# Altium PCB LM-008.PcbDoc (part 1 of 2)
Units mil, origin at the board's own origin, x right, y up, seen from the top; angles counter-clockwise.
Board outline 2402.07 x 2867.53 mil, 4 copper layers (Top Layer, Signal Layer 1, Signal Layer 2, Bottom Layer), stack 30.635 mil thick; 53 components, 52 nets, 456 pads, 38 vias.
Unrouted connection lines stored in the file: 15.
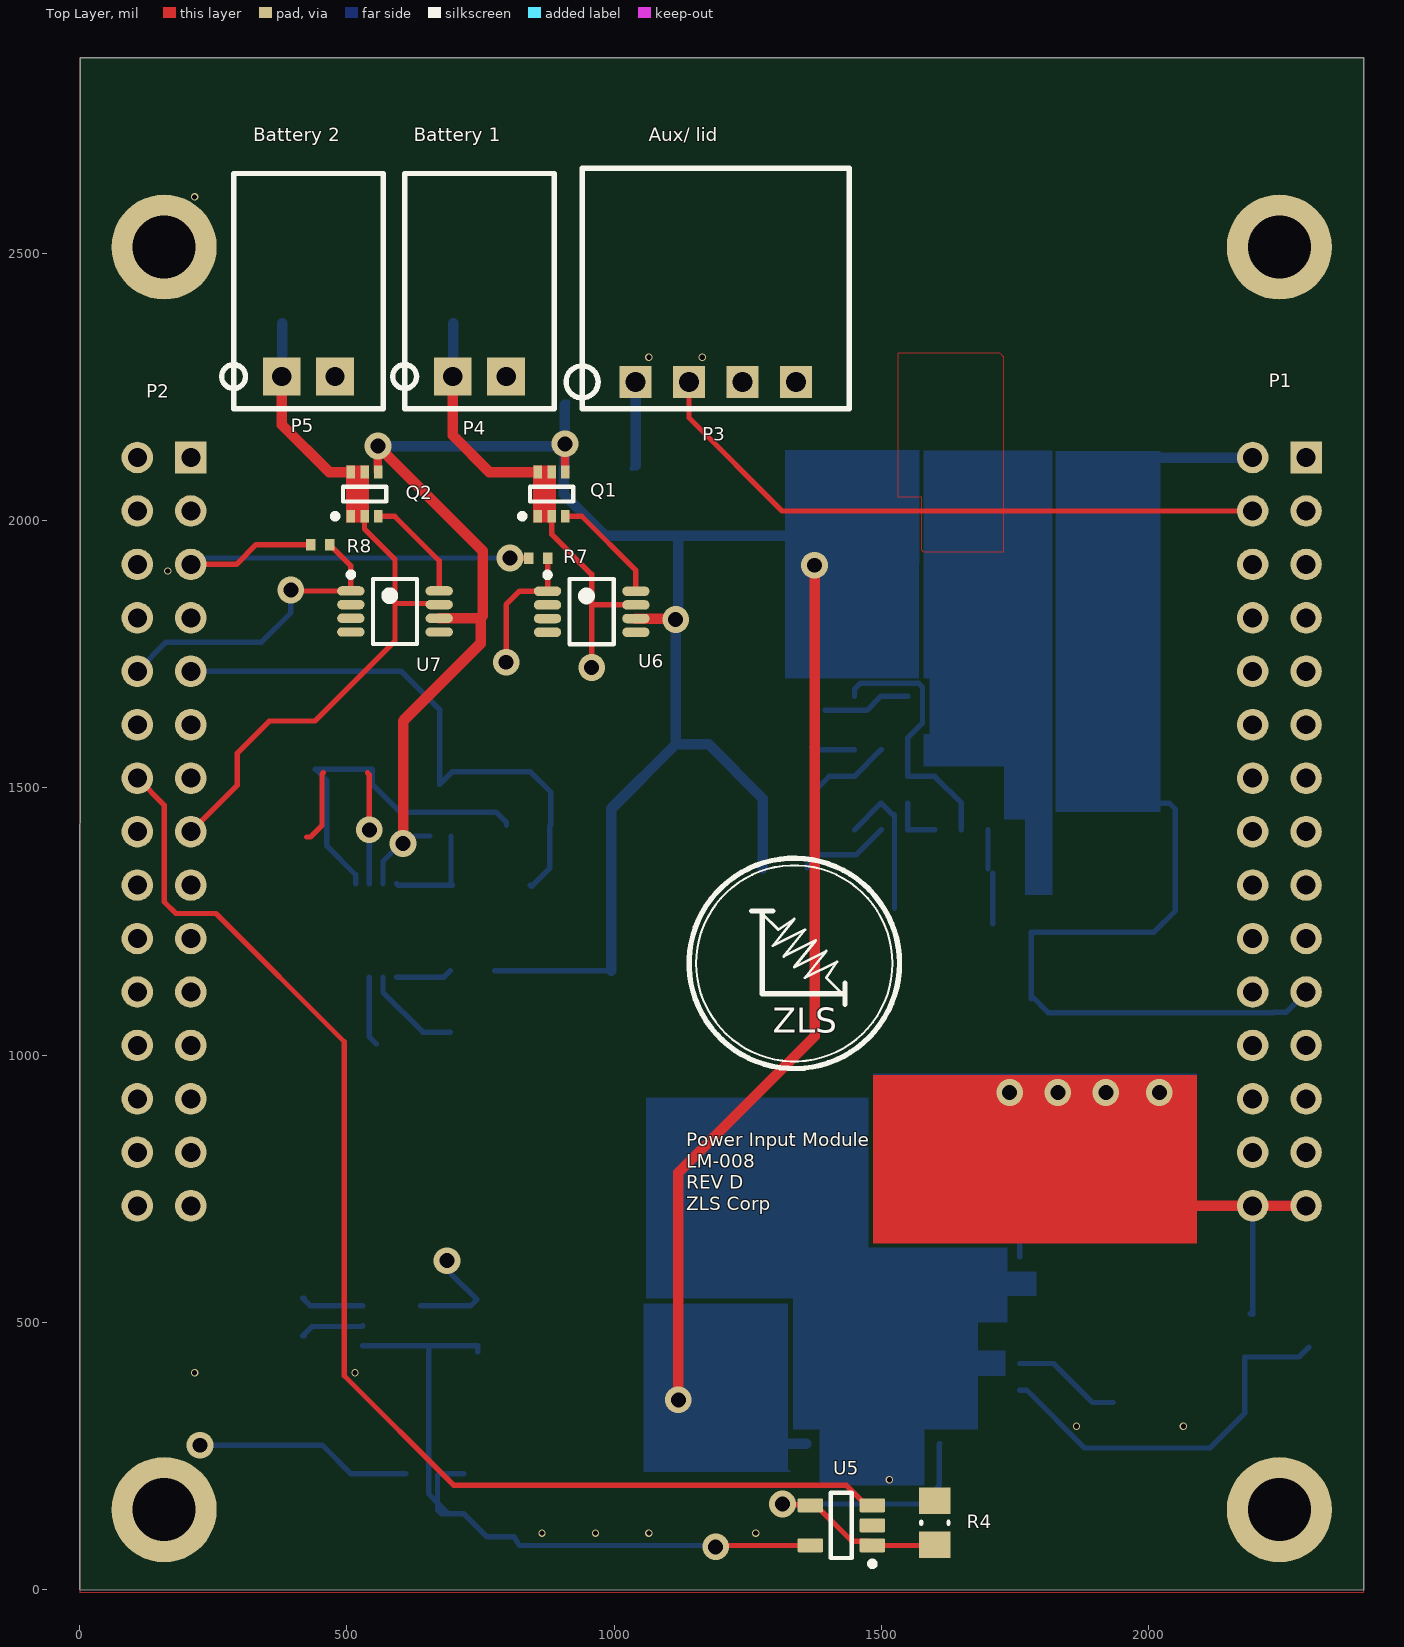
[diagram p0: Top Layer view]
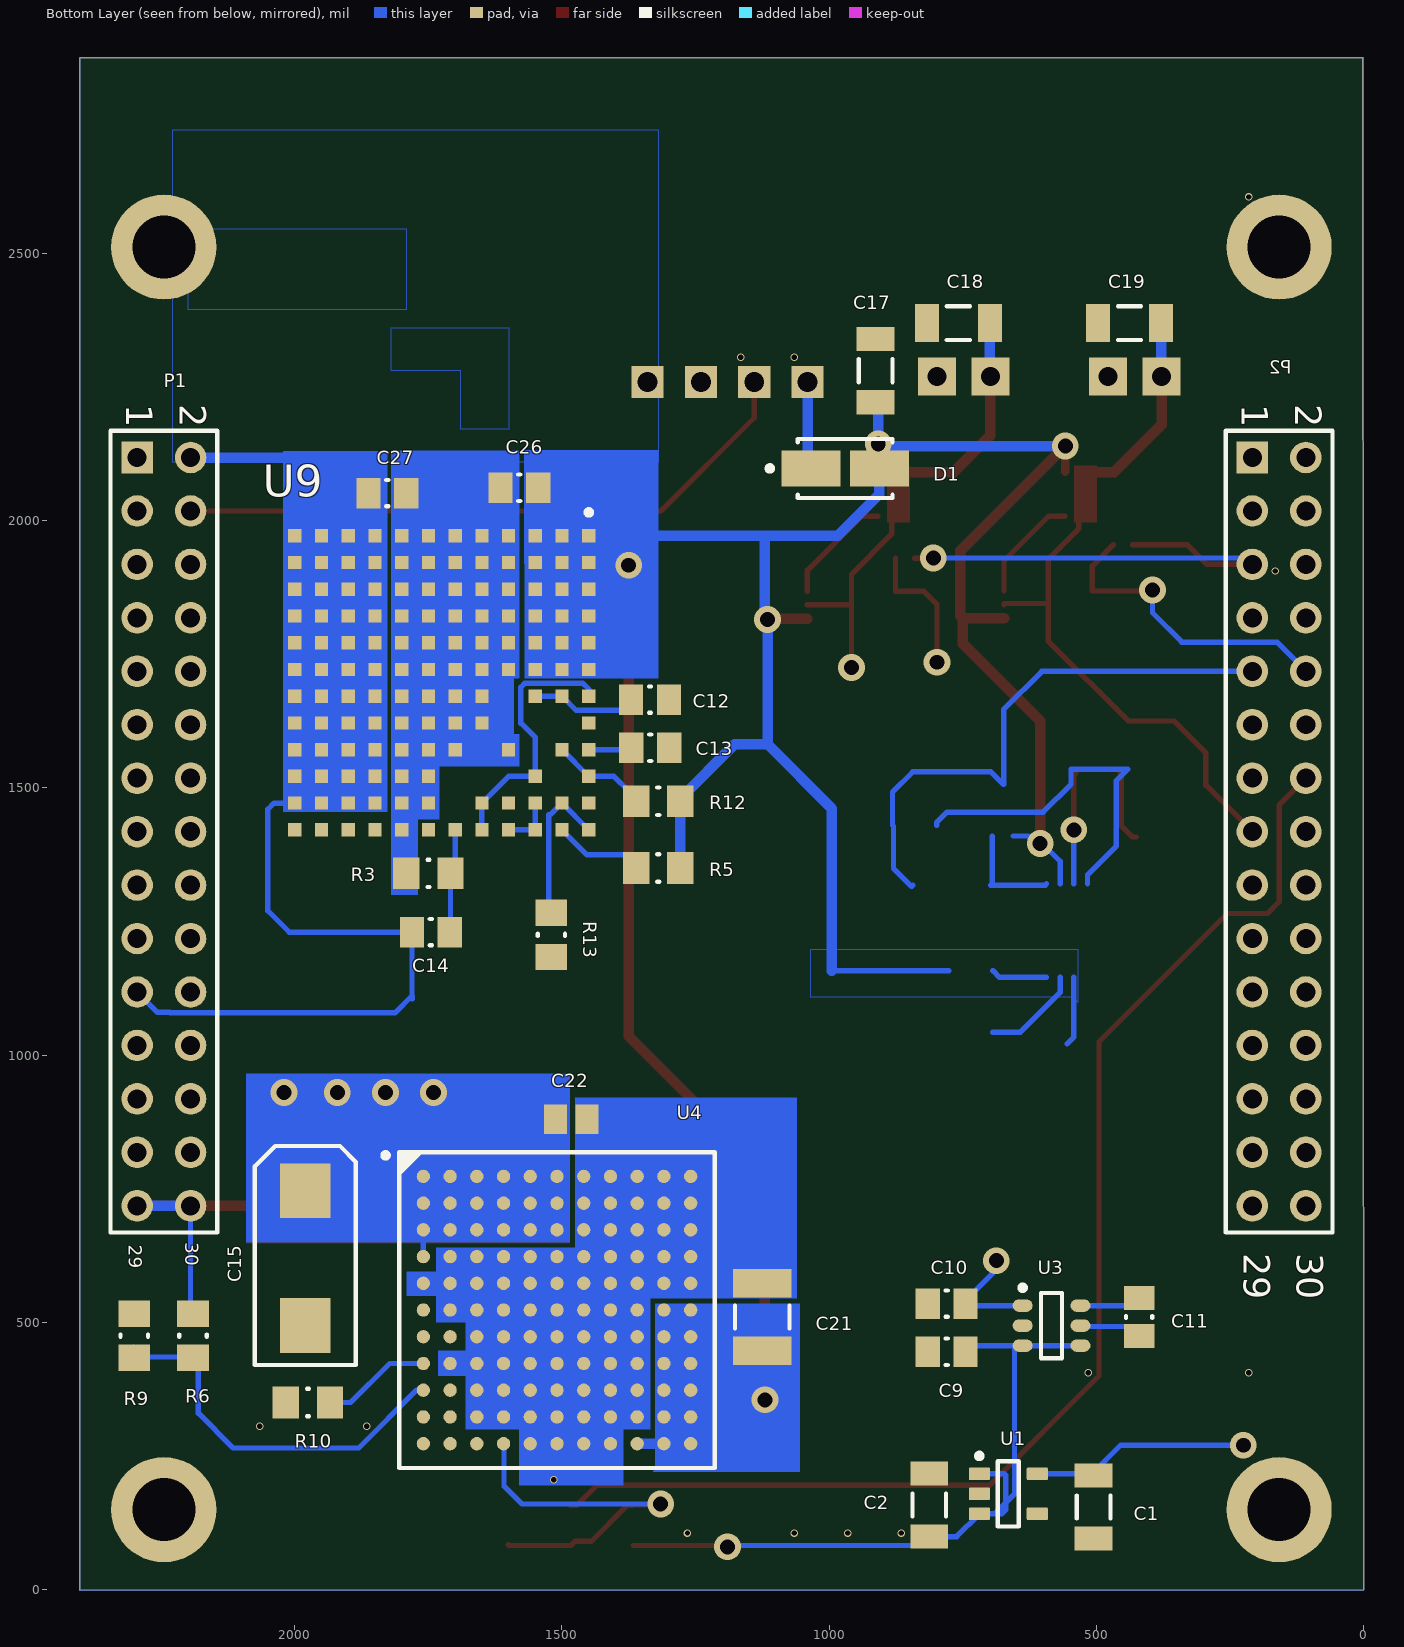
[diagram p1: Bottom Layer view, seen from below]
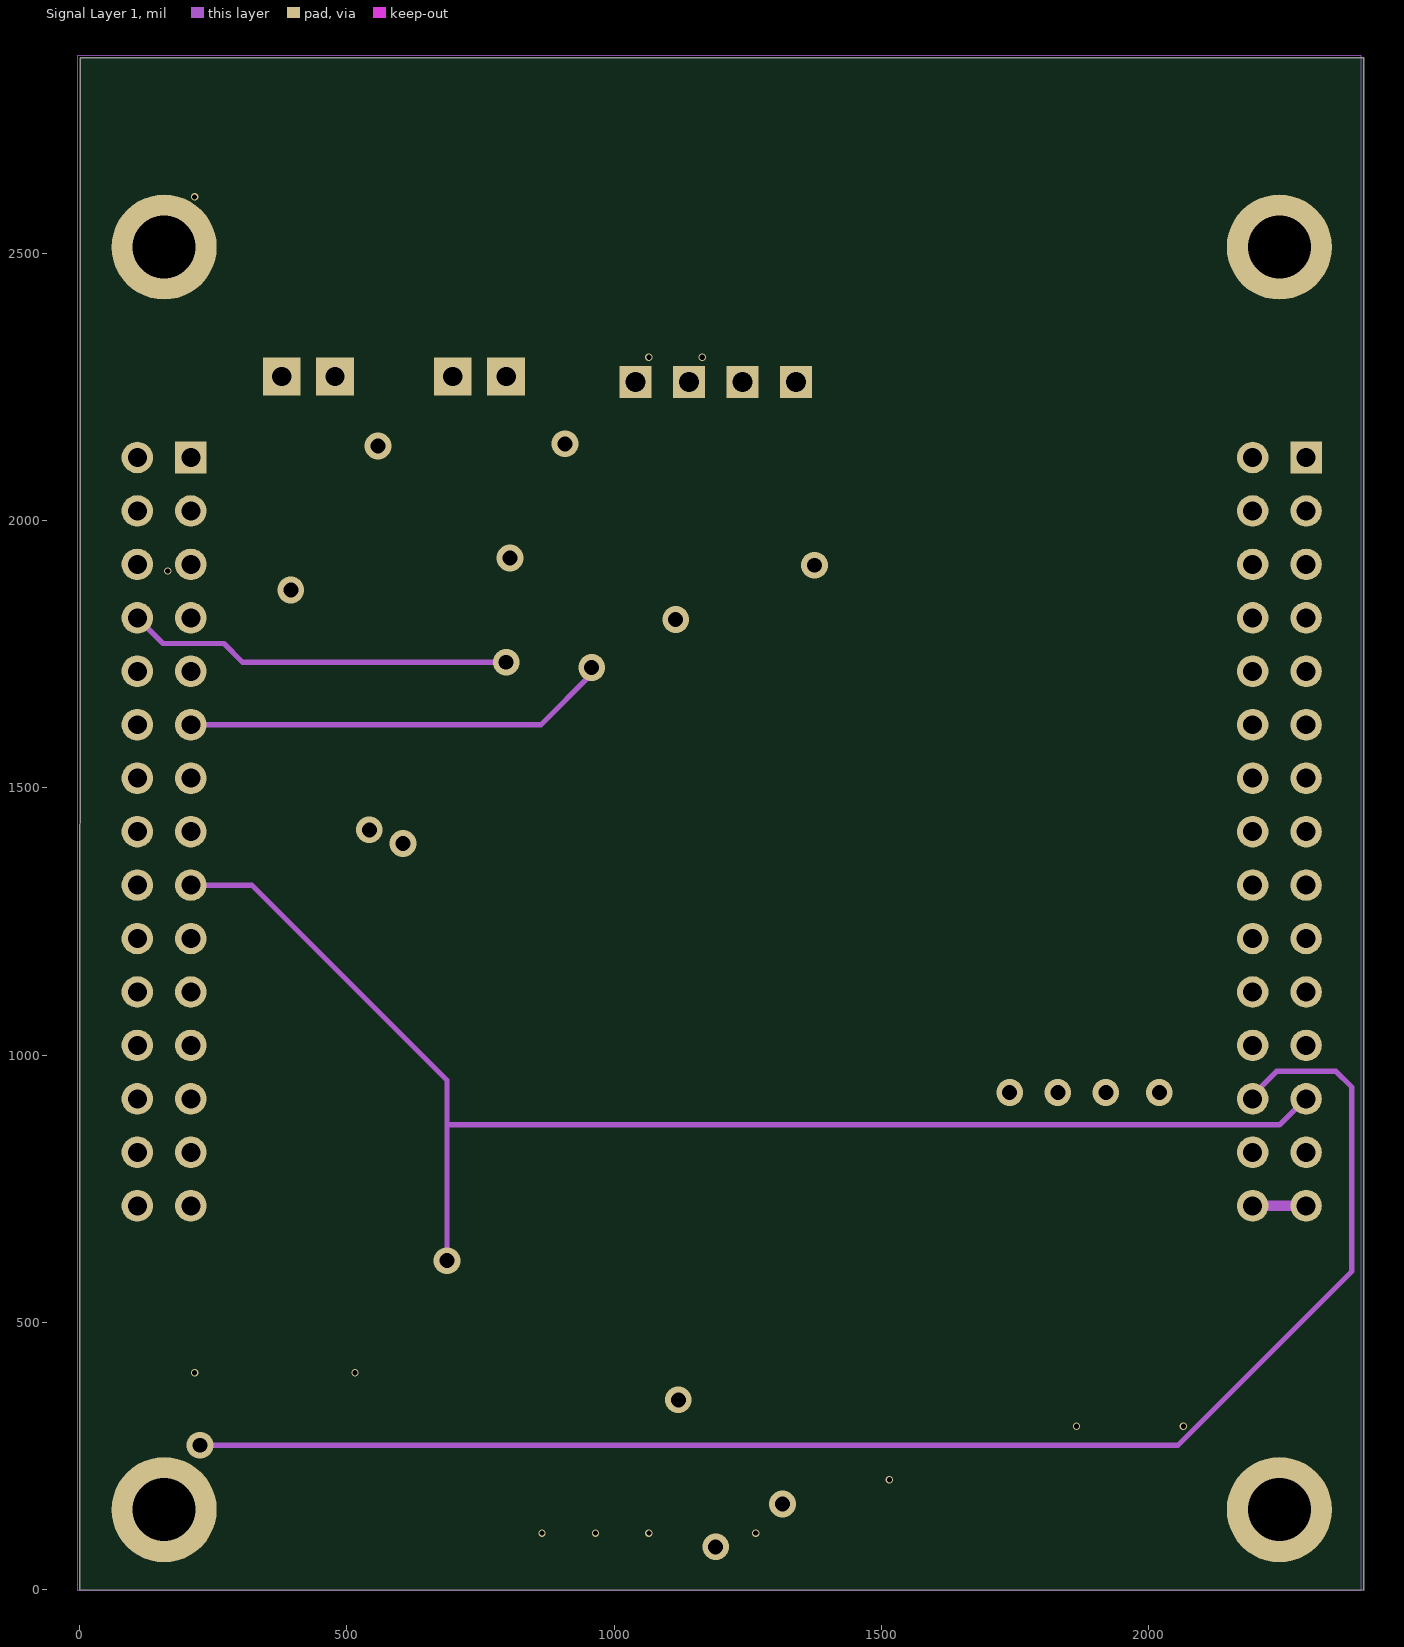
[diagram p2: Signal Layer 1]
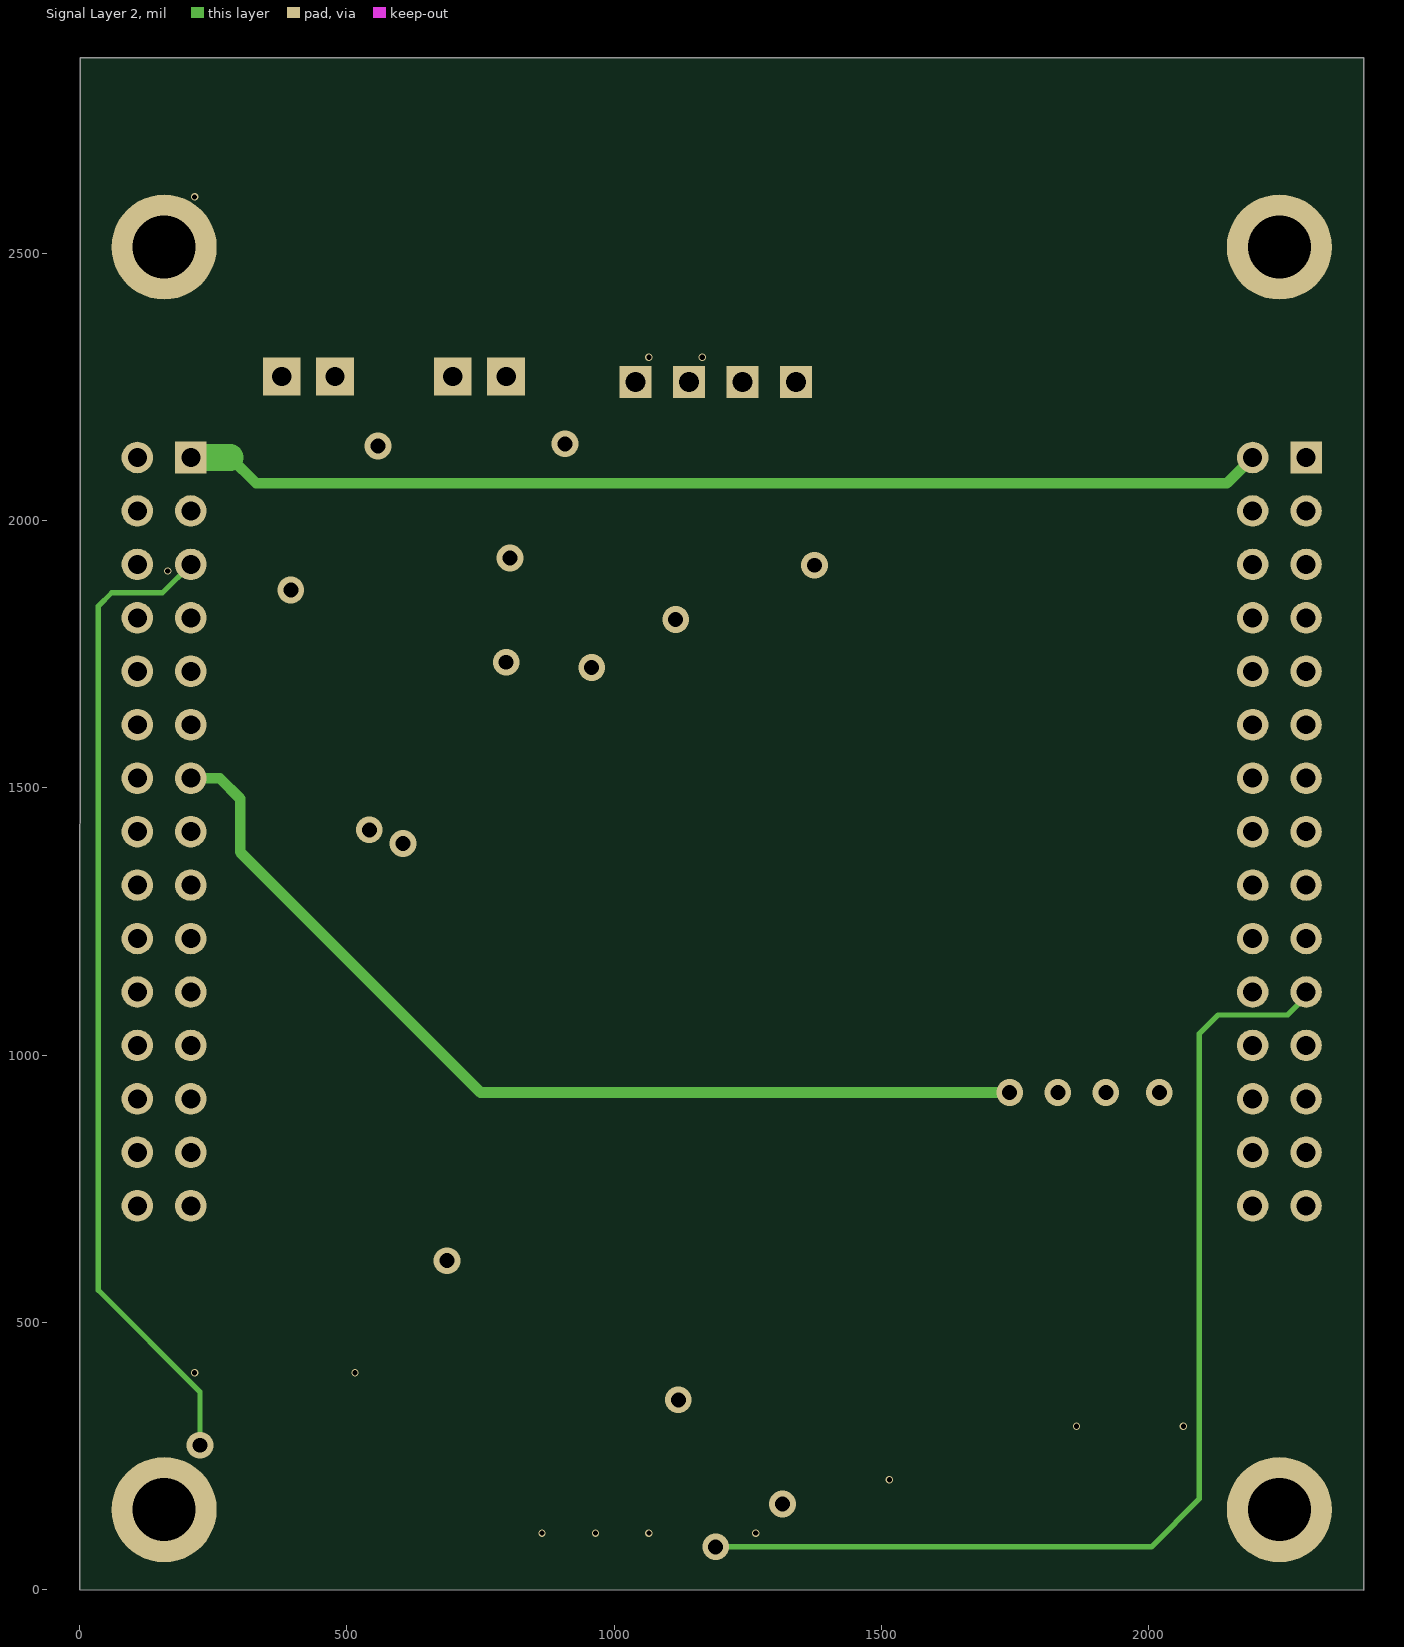
[diagram p3: Signal Layer 2]

## Layer stack, top to bottom
Top Solder: solder mask 0.4, Solder Resist, Dk 3.5
Top Layer: signal copper 1.4
Dielectric 1: core 10, FR-4, Dk 4.2
Signal Layer 1: signal copper 1.4173
Dielectric 3: prepreg 5, Dk 4.2
Signal Layer 2: signal copper 1.4173
Dielectric 2: core 10, Dk 4.2
Bottom Layer: signal copper 1.4
Bottom Solder: solder mask 0.4, Solder Resist, Dk 3.5

## Board outline
0,-0.49 2402.07,-1.4 2402.07,2866.13 1.04,2866.04

## Design rules (kind name [scope] priority, off if disabled: settings)
Clearance [All] p1: gap=3.94 ignorepadtopadclearanceinfootprint=TRUE except(0.2: SMDPad-Via THPad-THPad THPad-Via Via-Via; 7.87: Arc-Hole Track-Hole Text-Text Text-Hole)
HoleSize [All] p1: absolutevalues=TRUE maxlimit=196.85 minlimit=0.39 maxpercent=80.000 minpercent=20.000
HoleToHoleClearance [All] p1: gap=0.39 allowstackedmicrovias=TRUE
MinimumSolderMaskSliver [All] p1: minsoldermaskwidth=1.46
PolygonConnect [All] p1: connectstyle=Relief reliefconductorwidth=10 reliefentries=4 polygonreliefangle="90 Angle" airgapwidth=10
RoomDefinition ZP [InComponentClass('ZP')] p1: confinementstyle=ConfineIn formatcopy=TRUE lockcomponents=FALSE outline 2755,1085 3685,1085 3685,1700 2755,1700
RoutingVias [All] p1: holewidth=28 width=50 viastyle="Through Hole" minholewidth=28 minwidth=50 maxholewidth=28 maxwidth=50
SilkToSilkClearance [All] p1: silktosilkclearance=7.87
SilkToSolderMaskClearance [IsPad] p1: minsilkscreentomaskgap=6.89 clearancetoexposedcopper=TRUE
SolderMaskExpansion [All] p1: expansion=4
Width [All] p1: maxlimit=39.37 minlimit=5 preferedwidth=10
25 further rules are at their usual default settings.

## Classes and differential pairs
component class BBB-Supply: C12 C13 C14 C26 C27 R3 R5 R12 R13 U9
component class 12_Supply: C15 C21 C22 R4 R6 R9 R10 U4 U5
component class Power_Input_FET: C17 C18 C19 D1 P3 P4 P5 Q1 Q2 R7 R8 RL2 RL? U6 U7
component class ZP: C3 C4 C5 C6 C8 D2 L1 R1 R2 R11 R14 U2
component class LM-008: C1 C2 C9 C10 C11 P1 P2 U1 U3

## Components (designator, comment, footprint, x,y, rotation, side; value= is the part's Value field where it differs from the comment)
C1 "CAP CER 1UF 50V X7R 1210" CAPC1206(3216)130_N 505,154.55 r90 bottom
C2 "CAP CER 1UF 50V X7R 1210" CAPC1206(3216)130_N 812.59,158.1 r270 bottom
C3 "220pF" CAPC0402(1005)60_L 3035,1374.11 r270 top
C4 "47pF" CAPC0402(1005)60_L 3081.82,1470 r270 top
C5 "4.7uF" CAPC0805(2012)155_L 2965,1390 r270 top
C6 ".47uF" CAPC0402(1005)60_L 3529.17,1374.11 r270 top
C8 "CAP CER 1UF 25V X7R 0805" CAPC0805(2012)155_L 3220,1530 r270 top
C9 "10uF" CAPC0805(2012)145_N 780,445 r0 bottom
C10 "10uF" CAPC0805(2012)145_N 780,535 r0 bottom
C11 "1uF" CAPC0805(2012)145_N 420,510 r90 bottom
C12 "10uF" CAPC0805(2012)145_N 1335,1665 r180 bottom
C13 ".01uF" CAPC0805(2012)145_N 1334.57,1575 r0 bottom
C14 "10uF" CAPC0805(2012)145_N 1745,1230 r180 bottom
C15 "68uF" AVX-CAPC7343_V 1980,620 r270 bottom
C17 "CAP CER 10UF 6.3V X5R 1206" CAPC1206(3216)130_N 912.98,2280.55 r270 bottom
C18 "CAP CER 10UF 6.3V X5R 1206" CAPC1206(3216)130_N 757.98,2369.55 r180 bottom
C19 "CAP CER 10UF 6.3V X5R 1206" CAPC1206(3216)130_N 437.98,2369.55 r180 bottom
C21 "4.7uF" CAPC1210(3225)100_M 1125,510 r270 bottom
C22 "10uF" C0805 1482.13,880 r180 bottom
C26 "10uF" CAPC0805(2012)145_N 1579.57,2061.5 r0 bottom
C27 "10uF" CAPC0805(2012)145_N 1826.49,2051.5 r180 bottom
D1 "CDBA540-HF" VISH-DO-214AC-2_M 969.98,2097.55 r180 bottom
D2 "1N5819HW-7-F" DIOD-SOD-123-2_V 3160,1360.4 r90 top
L1 "74404054330" "WE-LQS 5040" 2945,1225 r270 top
P1 "SSW-115-21-G-D" HDR2X15 2294.59,2118.05 r270 bottom locked
P2 "Header 15X2" HDR2X15 207.98,2118.05 r270 bottom
P3 "IPL1-104-01-L-S-RA-K" IPL1-104-01-L-S-RA-K 1039.98,2259.55 r0 top
P4 "IPL1-102-01-F-S-RA-K" IPL1-102-01-F-S-RA-K 697.98,2269.55 r0 top
P5 "IPL1-102-01-F-S-RA-K" IPL1-102-01-F-S-RA-K 377.98,2269.55 r0 top
Q1 "MCH6336-TL-E" ONSC-MCPH-6_V 882.98,2049.55 r90 top
Q2 "MCH6336-TL-E" ONSC-MCPH-6_V 532.98,2049.55 r90 top
R1 "487k" RESC0402(1005)_M 3540,1265 r90 top
R2 "768" RESC0402(1005)_M 3225,1408.63 r90 top
R3 "100k" RESC0805(2012)_M 1749.57,1340 r180 bottom
R4 "RES SMD 100K OHM 1% 1/8W 0805" RESC0805(2012)_M 1600,125 r90 top
R5 "2M" RESC0805(2012)_M 1319.57,1350 r0 bottom
R6 "RES SMD 100K OHM 1% 1/8W 0805" RESC0805(2012)_M 2190,475 r270 bottom
R7 "560k" RESC0402(1005)_L 857.98,1929.55 r180 top
R8 "560k" RESC0402(1005)_L 450,1955 r180 top
R9 "RES SMD 11K OHM 1% 1/8W 0805" RESC0805(2012)_M 2300,475 r90 bottom
R10 "RES SMD 35K OHM 1% 1/8W 0805" RESC0805(2012)_M 1975,350 r0 bottom
R11 "6.19k" RESC0402(1005)_M 3580,1355 r90 top
R12 "100k" RESC0805(2012)_M 1319.57,1475 r180 bottom
R13 "392k" RESC0805(2012)_M 1519.57,1225 r270 bottom
R14 "6.19k" RESC0402(1005)_M 3081.82,1381.68 r90 top
U1 "TLV70233DBVR" DBV0005A_N 664.59,179.1 r180 bottom
U2 "LT8570" LT8570-MSOP 3380,1341.63 r0 top
U3 "LM2776DBVR" LM2776DBVR 583.73,493.84 r180 bottom
U4 "LTM8055IY" LT-BGA-121-15000X15000X4920 1509,523 r180 bottom
U5 "OPA188AIDBVR" DBV0005A_M 1425,120 r180 top
U6 "LTC4414EMS8#TRPBF" LT-MS8-8_L 957.98,1829.55 r0 top
U7 "LTC4414EMS8#TRPBF" LT-MS8-8_L 590,1830 r0 top
U9 "LTM4612EV#PBF" LT-LGA-133-05-08-1766_V 1724.57,1696.5 r270 bottom

## Footprints (in the part's own frame and the unit in brackets; to place one, negate y for a bottom-side part, rotate by r counter-clockwise, add the part's x,y. Pads: shape width x height; smd on the part's side, far side on the other; paste and mask are expansions set on the pad)
AVX-CAPC7343_V [mm] "SMT Capacitor, 2 Leads, Body 7.3x4.3mm"
  rect 2.6x2.4 smd: 1(-3.202,0.007) 2(3.198,0.007)
  silkscreen extent -5.33,-2.4 5.08,2.4, body extent -3.49,-2.03 3.51,2.04, height 2.9
C0805 [mm] "Chip Capacitor, Body 2.0x1.3mm, IPC High Density"
  rect 1.1x1.4 smd: 1(-0.75,0) 2(0.75,0)
  body extent -1.1,-0.72 1.1,0.72, height 1.4
CAPC0402(1005)60_L [mm] "Chip Capacitor, Body 1.0x0.5mm, Height 0.6mm, IPC High Density"
  rect 0.52x0.52 smd: 1(-0.4,0) 2(0.4,0)
  body extent -0.55,-0.3 0.55,0.3, height 0.6
CAPC0805(2012)145_N [mm] "Chip Capacitor, Body 2.0x1.2mm, Height 1.45mm, IPC Medium Density"
  rect 1.15x1.45 smd: 1(-0.9,0) 2(0.9,0)
  silkscreen extent -0.05,-0.63 0.05,0.63, body extent -1.1,-0.72 1.1,0.73, height 1.45
CAPC0805(2012)155_L [mm] "Chip Capacitor, Body 2.0x1.2mm, Height 1.55mm, IPC High Density"
  rect 0.95x1.35 smd: 1(-0.8,0) 2(0.8,0)
  silkscreen extent -0.05,-0.58 0.05,0.58, body extent -1.1,-0.72 1.1,0.72, height 1.55
CAPC1206(3216)130_N [mm] "Chip Capacitor, Body 3.2x1.6mm, Height 1.3mm, IPC Medium Density"
  rect 1.15x1.8 smd: 1(-1.5,0) 2(1.5,0)
  silkscreen extent -0.55,-0.8 0.55,0.8, body extent -1.7,-0.9 1.7,0.9, height 1.3
CAPC1210(3225)100_M [mm] "Chip Capacitor, Body 3.2x2.5mm, Height 1mm, IPC Low Density"
  rect 1.35x2.8 smd: 1(-1.6,0) 2(1.6,0)
  silkscreen extent -0.55,-1.3 0.55,1.3, body extent -1.7,-1.35 1.7,1.35, height 1
DBV0005A_M [mm] "SOT23, 5-Leads, Body 3.05x1.75mm, Pitch 0.95mm, IPC Low Density"
  rrect15% 1.2x0.65 smd: 1(-1.475,0.95) 2(-1.475,0) 3(-1.475,-0.95) 4(1.475,-0.95) 5(1.475,0.95)
  silkscreen extent -1.6,-1.55 0.5,1.95, body extent -1.42,-1.46 1.42,1.46, height 1.08
DBV0005A_N [mm] "SOT23, 5-Leads, Body 3.05x1.75mm, Pitch 0.95mm, IPC Medium Density"
  rrect17% 1x0.6 smd: 1(-1.375,0.95) 2(-1.375,0) 3(-1.375,-0.95) 4(1.375,-0.95) 5(1.375,0.95)
  silkscreen extent -1.5,-1.55 0.5,1.92, body extent -1.42,-1.46 1.42,1.46, height 1.08
DIOD-SOD-123-2_V [mm] "SOD-123, 2-Leads, Body 2.85x1.7mm (max), Pitch 3.7mm"
  rect 1.2x0.7 smd: 1(-1.85,0) 2(1.85,0)
  silkscreen extent -1.43,-0.85 1.97,1.02, body extent -1.42,-0.85 1.43,0.85, height 1.45
HDR2X15 [mm] "Connector; Header; 15x2 Position"
  rect 1.5x1.5 hole 0.9: 1(0,0)
  round 1.5 hole 0.9: 2(0,2.54) 3(2.54,0) 4(2.54,2.54) 5(5.08,0) 6(5.08,2.54) 7(7.62,0) 8(7.62,2.54) 9(10.16,0) 10(10.16,2.54) 11(12.7,0) 12(12.7,2.54) 13(15.24,0) 14(15.24,2.54) 15(17.78,0) 16(17.78,2.54) 17(20.32,0) 18(20.32,2.54) 19(22.86,0) 20(22.86,2.54) 21(25.4,0) 22(25.4,2.54) 23(27.94,0) 24(27.94,2.54) 25(30.48,0) 26(30.48,2.54) 27(33.02,0) 28(33.02,2.54) 29(35.56,0) 30(35.56,2.54)
  silkscreen extent -1.27,-1.27 36.83,3.81
IPL1-102-01-F-S-RA-K [mm] ".100 TERMINAL ASSEMBLY"
  rect 1.8x1.8 hole 0.91: 1(0,0) 2(2.54,0)
  silkscreen extent -2.85,-1.52 4.83,9.65, body extent -2.03,-0.25 4.57,9.4, height 6.56
IPL1-104-01-L-S-RA-K [mil]
  rect 60x60 hole 37.4: 1(0,0) 2(100,0) 3(200,0) 4(300,0)
  silkscreen extent -130,-50 400,400, body extent -80,-12 380,380, height 258
LM2776DBVR [mm]
  oval 0.95x0.6 smd: 1(-1.375,0.95) 2(-1.375,0) 3(-1.375,-0.95) 4(1.375,-0.95) 5(1.375,0) 6(1.375,0.95)
  silkscreen extent -1.5,-1.55 0.5,1.92, body extent -1.39,-1.55 1.39,1.55, height 1.45
LT8570-MSOP [mm]
  oval 1.35x0.5 smd: 1(-2.225,0.975) 2(-2.225,0.325) 3(-2.225,-0.325) 4(-2.225,-0.975) 5(2.225,-0.975) 6(2.225,-0.325) 7(2.225,0.325) 8(2.225,0.975)
  rect 1.75x1.96 smd: 9(0,0)
  silkscreen extent -2.35,-1.55 1.15,1.9, body extent -2.45,-1.55 2.45,1.55, height 1.1
LT-BGA-121-15000X15000X4920 [mil] "BGA, 121-Balls, Body 15x15mm, Pitch 1.27mm"
  round 25 smd: A1(-250,250) A2(-200,250) A3(-150,250) A4(-100,250) A5(-50,250) A6(0,250) A7(50,250) A8(100,250) A9(150,250) A10(200,250) A11(250,250) B1(-250,200) B2(-200,200) B3(-150,200) B4(-100,200) B5(-50,200) B6(0,200) B7(50,200) B8(100,200) B9(150,200) B10(200,200) B11(250,200) C1(-250,150) C2(-200,150) C3(-150,150) C4(-100,150) C5(-50,150) C6(0,150) C7(50,150) C8(100,150) C9(150,150) C10(200,150) C11(250,150) D1(-250,100) D2(-200,100) D3(-150,100) D4(-100,100) D5(-50,100) D6(0,100) D7(50,100) D8(100,100) D9(150,100) D10(200,100) D11(250,100) E1(-250,50) E2(-200,50) E3(-150,50) E4(-100,50) E5(-50,50) E6(0,50) E7(50,50) E8(100,50) E9(150,50) E10(200,50) E11(250,50) F1(-250,0) F2(-200,0) F3(-150,0) F4(-100,0) F5(-50,0) F6(0,0) F7(50,0) F8(100,0) F9(150,0) F10(200,0) F11(250,0) G1(-250,-50) G2(-200,-50) G3(-150,-50) G4(-100,-50) G5(-50,-50) G6(0,-50) G7(50,-50) G8(100,-50) G9(150,-50) G10(200,-50) G11(250,-50) H1(-250,-100) H2(-200,-100) H3(-150,-100) H4(-100,-100) H5(-50,-100) H6(0,-100) H7(50,-100) H8(100,-100) H9(150,-100) H10(200,-100) H11(250,-100) J1(-250,-150) J2(-200,-150) J3(-150,-150) J4(-100,-150) J5(-50,-150) J6(0,-150) J7(50,-150) J8(100,-150) J9(150,-150) J10(200,-150) J11(250,-150) K1(-250,-200) K2(-200,-200) K3(-150,-200) K4(-100,-200) K5(-50,-200) K6(0,-200) K7(50,-200) K8(100,-200) K9(150,-200) K10(200,-200) K11(250,-200) L1(-250,-250) L2(-200,-250) L3(-150,-250) L4(-100,-250) L5(-50,-250) L6(0,-250) L7(50,-250) L8(100,-250) L9(150,-250) L10(200,-250) L11(250,-250)
  silkscreen extent -326,-295 295,295, body extent -295,-295 295,295, height 202
LT-LGA-133-05-08-1766_V [mm] "LGA, 133-Leads, Body 15x15mm, Pitch 1.27mm"
  rect 0.63x0.63 smd: A1(-6.985,6.985) A2(-5.715,6.985) A3(-4.445,6.985) A4(-3.175,6.985) A5(-1.905,6.985) A6(-0.635,6.985) A7(0.635,6.985) A8(1.905,6.985) A9(3.175,6.985) A10(4.445,6.985) A11(5.715,6.985) A12(6.985,6.985) B1(-6.985,5.715) B2(-5.715,5.715) B3(-4.445,5.715) B4(-3.175,5.715) B5(-1.905,5.715) B6(-0.635,5.715) B7(0.635,5.715) B9(3.175,5.715) B11(5.715,5.715) B12(6.985,5.715) C1(-6.985,4.445) C2(-5.715,4.445) C3(-4.445,4.445) C4(-3.175,4.445) C5(-1.905,4.445) C6(-0.635,4.445) C7(0.635,4.445) C10(4.445,4.445) C11(5.715,4.445) C12(6.985,4.445) D1(-6.985,3.175) D2(-5.715,3.175) D3(-4.445,3.175) D4(-3.175,3.175) D5(-1.905,3.175) D6(-0.635,3.175) D9(3.175,3.175) D11(5.715,3.175) D12(6.985,3.175) E1(-6.985,1.905) E2(-5.715,1.905) E3(-4.445,1.905) E4(-3.175,1.905) E5(-1.905,1.905) E6(-0.635,1.905) E7(0.635,1.905) E8(1.905,1.905) E11(5.715,1.905) E12(6.985,1.905) F1(-6.985,0.635) F2(-5.715,0.635) F3(-4.445,0.635) F4(-3.175,0.635) F5(-1.905,0.635) F6(-0.635,0.635) F7(0.635,0.635) F8(1.905,0.635) F9(3.175,0.635) F12(6.985,0.635) G1(-6.985,-0.635) G2(-5.715,-0.635) G3(-4.445,-0.635) G4(-3.175,-0.635) G5(-1.905,-0.635) G6(-0.635,-0.635) G7(0.635,-0.635) G8(1.905,-0.635) G9(3.175,-0.635) G10(4.445,-0.635) G11(5.715,-0.635) G12(6.985,-0.635) H1(-6.985,-1.905) H2(-5.715,-1.905) H3(-4.445,-1.905) H4(-3.175,-1.905) H5(-1.905,-1.905) H6(-0.635,-1.905) H7(0.635,-1.905) H8(1.905,-1.905) H9(3.175,-1.905) H10(4.445,-1.905) H11(5.715,-1.905) H12(6.985,-1.905) J1(-6.985,-3.175) J2(-5.715,-3.175) J3(-4.445,-3.175) J4(-3.175,-3.175) J5(-1.905,-3.175) J6(-0.635,-3.175) J7(0.635,-3.175) J8(1.905,-3.175) J9(3.175,-3.175) J10(4.445,-3.175) J11(5.715,-3.175) J12(6.985,-3.175) K1(-6.985,-4.445) K2(-5.715,-4.445) K3(-4.445,-4.445) K4(-3.175,-4.445) K5(-1.905,-4.445) K6(-0.635,-4.445) K7(0.635,-4.445) K8(1.905,-4.445) K9(3.175,-4.445) K10(4.445,-4.445) K11(5.715,-4.445) K12(6.985,-4.445) L1(-6.985,-5.715) L2(-5.715,-5.715) L3(-4.445,-5.715) L4(-3.175,-5.715) L5(-1.905,-5.715) L6(-0.635,-5.715) L7(0.635,-5.715) L8(1.905,-5.715) L9(3.175,-5.715) L10(4.445,-5.715) L11(5.715,-5.715) L12(6.985,-5.715) M1(-6.985,-6.985) M2(-5.715,-6.985) M3(-4.445,-6.985) M4(-3.175,-6.985) M5(-1.905,-6.985) M6(-0.635,-6.985) M7(0.635,-6.985) M8(1.905,-6.985) M9(3.175,-6.985) M10(4.445,-6.985) M11(5.715,-6.985) M12(6.985,-6.985)
  silkscreen extent -8.22,6.86 -7.98,7.11, body extent -7.5,-7.5 7.5,7.5, height 2.92
LT-MS8-8_L [mm] "SOP, 8-Leads, Body 3.1x3.1mm, Pitch 0.65mm, IPC High Density"
  oval 1.3x0.45 smd: 1(-2.1,0.975) 2(-2.1,0.325) 3(-2.1,-0.325) 4(-2.1,-0.975) 5(2.1,-0.975) 6(2.1,-0.325) 7(2.1,0.325) 8(2.1,0.975)
  silkscreen extent -2.22,-1.55 1.05,1.87, body extent -1.55,-1.55 1.55,1.55, height 1.1
ONSC-MCPH-6_V [mm] "SOT23, 6-Leads, Body 2x1.6mm, Pitch 0.65mm"
  rect 0.6x0.4 smd: 1(-1.05,0.65) 2(-1.05,0) 3(-1.05,-0.65) 4(1.05,-0.65) 5(1.05,0) 6(1.05,0.65)
  silkscreen extent -1.17,-1.03 0.35,1.52, body extent -0.8,-1 0.8,1, height 0.9
RESC0402(1005)_L [mm] "Chip Resistor, Body 1.0x0.5mm, IPC High Density"
  rect 0.45x0.55 smd: 1(-0.45,0) 2(0.45,0)
  body extent -0.52,-0.27 0.53,0.28, height 0.4
RESC0402(1005)_M [mm] "Chip Resistor, Body 1.0x0.5mm, IPC Low Density"
  rect 0.65x0.75 smd: 1(-0.55,0) 2(0.55,0)
  body extent -0.52,-0.28 0.53,0.28, height 0.4
RESC0805(2012)_M [mm] "Chip Resistor, Body 2.0x1.3mm, IPC Low Density"
  rect 1.25x1.5 smd: 1(-1.05,0) 2(1.05,0)
  silkscreen extent -0.05,-0.65 0.05,0.65, body extent -1.1,-0.67 1.1,0.67, height 0.7
VISH-DO-214AC-2_M [mm] "DO-214AC, 2-Leads, Body 4.5x2.79mm, IPC Low Density"
  rect 2.8x1.7 smd: 1(-1.625,0) 2(1.625,0)
  silkscreen extent -3.7,-1.4 2.25,1.4, body extent -2.25,-1.39 2.25,1.4, height 2.29
"WE-LQS 5040" [mm] "SMD Power Inductor, 2-Leads, Body 5.0x5.0mm"
  rect 1.4x4.2 smd: 1(-1.85,0) 2(1.85,0)
  body extent -2.5,-2.5 2.5,2.5, height 3.99

## Part data
C1 C2: library part CMP-1037-04913-1, Capacitance=1µF, Manufacturer="Murata Electronics North America", Manufacturer Part Number=GRM32RR71H105KA01L, Operating Temperature="-55°C ~ 125°C", Package / Case="1210 (3225 Metric)", Ratings=-, Supplier Part Number 1=490-1863-6-ND, Temperature Coefficient=X7R, Tolerance=±10%, Voltage - Rated=50V, Applications="General Purpose", Category=Capacitors, ComponentLink1Description=http://search.murata.co.jp/Ceramy/image/img/A01X/G101/ENG/GRM32RR71H105KA01-01.pdf, ComponentLink1URL=http://search.murata.co.jp/Ceramy/image/img/A01X/G101/ENG/GRM32RR71H105KA01-01.pdf, Features=-, Height - Seated (Max)=-, Lead Spacing=-, Lead Style=-, Mounting Type="Surface Mount, MLCC", Packaging=Digi-Reel®, Part Status=Active, Pricing 1="1=0.35, 10=0.242, 100=0.1449, 500=0.10868 (USD)", RoHS="RoHS Compliant", Size / Dimension="0.126\" L x 0.098\" W (3.20mm x 2.50mm)", Stock 1=66890, Supplier 1=Digi-Key, Thickness (Max)="0.079\" (2.00mm)"
C3 C4 C6: library part CMP-1034-00252-1, "CAP CER 0.1UF 10V X7R 0402"
C5: library part CMP-1036-04882-1
C8: library part CMP-1036-04882-1, Capacitance=4.7uF, Manufacturer="Murata Electronics North America", Manufacturer Part Number=GRM21BR71E105KA99L, Operating Temperature="-55°C ~ 125°C", Package / Case="0805 (2012 Metric)", Ratings=-, Supplier Part Number 1=490-6484-6-ND, Temperature Coefficient=X7R, Tolerance=±10%, Voltage - Rated=25V, Applications="General Purpose", Category=Capacitors, ComponentLink1Description=http://www.murata.com/~/media/webrenewal/support/library/catalog/products/capacitor/mlcc/c02e.ashx, ComponentLink1URL=http://www.murata.com/~/media/webrenewal/support/library/catalog/products/capacitor/mlcc/c02e.ashx, Features=-, Height - Seated (Max)=-, Lead Spacing=-, Lead Style=-, Mounting Type="Surface Mount, MLCC", Packaging=Digi-Reel®, Part Status=Active, Pricing 1="1=0.14, 10=0.099, 100=0.0468, 500=0.0328, 1000=0.02715 (USD)", RoHS="RoHS Compliant", Size / Dimension="0.079\" L x 0.049\" W (2.00mm x 1.25mm)", Stock 1=295074, Supplier 1=Digi-Key, Thickness (Max)="0.053\" (1.35mm)"
C9 C10: library part CMP-1036-04795-1, "CAP CER 10UF 16V X6S 0805", Manufacturer="TDK Corporation", Manufacturer Part Number=C2012X6S1C106K085AC, Operating Temperature="-55°C ~ 105°C", Package / Case="0805 (2012 Metric)", Ratings=-, Supplier Part Number 1=445-14483-6-ND, Temperature Coefficient=X6S, Tolerance=±10%, Voltage - Rated=16V, Applications="General Purpose", Category=Capacitors, ComponentLink1Description=https://product.tdk.com/info/en/catalog/datasheets/mlcc_commercial_general_en.pdf, ComponentLink1URL=https://product.tdk.com/info/en/catalog/datasheets/mlcc_commercial_general_en.pdf, Failure Rate=-, Features="Low ESL", Height - Seated (Max)=-, Lead Spacing=-, Lead Style=-, Mounting Type="Surface Mount, MLCC", Notification="Current market demand for these product types have resulted in fluctuating and extending lead times. Lead times may differ.", Packaging=Digi-Reel®, Part Status=Active, Pricing 1="1=0.38, 10=0.259, 100=0.1466, 500=0.1035, 1000=0.09056 (USD)", RoHS="RoHS Compliant", Size / Dimension="0.079\" L x 0.049\" W (2.00mm x 1.25mm)", Stock 1=0, Supplier 1=Digi-Key, Thickness (Max)="0.039\" (1.00mm)"
C11: library part CMP-1036-04795-1, "CAP CER 1UF 25V X7R 0805", Manufacturer=Yageo, Manufacturer Part Number=CC0805KKX7R6BB105, Operating Temperature="-55°C ~ 125°C", Package / Case="0805 (2012 Metric)", Ratings=-, Supplier Part Number 1=311-1458-6-ND, Temperature Coefficient=X7R, Tolerance=±10%, Voltage - Rated=10V, Applications="General Purpose", Category=Capacitors, ComponentLink1Description=http://www.yageo.com/documents/recent/UPY-GPHC_X7R_6.3V-to-50V_18.pdf, ComponentLink1URL=http://www.yageo.com/documents/recent/UPY-GPHC_X7R_6.3V-to-50V_18.pdf, Failure Rate=-, Features=-, Height - Seated (Max)=-, Lead Spacing=-, Lead Style=-, Mounting Type="Surface Mount, MLCC", Notification="Current market demand for these product types have resulted in fluctuating and extending lead times. Lead times may differ.", Packaging=Digi-Reel®, Part Status=Active, Pricing 1="1=0.25, 10=0.168, 100=0.0852, 500=0.0583, 1000=0.05158 (USD)", RoHS="RoHS Compliant", Size / Dimension="0.079\" L x 0.049\" W (2.00mm x 1.25mm)", Stock 1=30000, Supplier 1=Digi-Key, Thickness (Max)="0.057\" (1.45mm)"
C12 C14 C26 C27: library part CMP-1036-04795-1, "CAP CER 10UF 25V X7R 0805", Capacitance="10 uF", Case Code - in=0805, Case Code - mm=2012, Dielectric=X5R, Manufacturer=TDK, Manufacturer Part Number=C2012X5R1V106K125AC, Maximum Operating Temperature="+ 85 C", Minimum Operating Temperature="- 55 C", Package / Case="0805 (2012 metric)", Supplier Part Number 1=810-C2012X5R1V106K1C, Tolerance="10 %", Voltage Rating DC="35 VDC", Brand=TDK, Category="Multilayer Ceramic Capacitors MLCC - SMD/SMT", Class="Class 2", ComponentLink1Description=https://www.mouser.com/datasheet/2/400/lcc_commercial_general_en-837201.pdf, ComponentLink1URL=https://www.mouser.com/datasheet/2/400/lcc_commercial_general_en-837201.pdf, Height="1.25 mm", Length="2 mm", Minimum Order Quantity=1, Packaging="Cut Tape", Pricing 1="1=0.920, 10=0.648, 100=0.426, 500=0.316, 1000=0.268, 2000=0.220 (USD)", Product="General Type MLCCs", Product Type="Ceramic Capacitors", Reeling=True, RoHS="RoHS Compliant", RoHS - Mouser=Y, Series=C, Standard Pack Qty=2000, Stock 1=33130, Subcategory=Capacitors, Supplier 1=Mouser, Termination Style=SMD/SMT, Type="Commercial Grade MLCC", Width="1.25 mm"
C13: library part CMP-1036-04795-1, Manufacturer=Yageo, Manufacturer Part Number=AC0805KRX7R7BB103, Operating Temperature="-55°C ~ 125°C", Package / Case="0805 (2012 Metric)", Ratings=AEC-Q200, Supplier Part Number 1=311-3161-6-ND, Temperature Coefficient=X7R, Tolerance=±10%, Voltage - Rated=16V, Applications=Automotive, Category=Capacitors, ComponentLink1Description=http://www.yageo.com/NewPortal/_en/search/productDocs.jsp?YageoPartNumber=AC0805KRX7R7BB103, ComponentLink1URL=http://www.yageo.com/NewPortal/_en/search/productDocs.jsp?YageoPartNumber=AC0805KRX7R7BB103, Failure Rate=-, Features=-, Height - Seated (Max)=-, Lead Spacing=-, Lead Style=-, Mounting Type="Surface Mount, MLCC", Packaging=Digi-Reel®, Part Status=Active, Pricing 1="1=0.22, 10=0.158, 100=0.0745, 500=0.05224, 1000=0.04324 (USD)", RoHS="RoHS Compliant", Size / Dimension="0.079\" L x 0.049\" W (2.00mm x 1.25mm)", Stock 1=311, Supplier 1=Digi-Key, Thickness (Max)="0.037\" (0.95mm)"
C15: library part CMP-0279-00002-2, "CAP TANT POLY 68UF 25V 2917", Case/Package=2917, Case Code (Metric)=7343, ESR (Equivalent Series Resistance)=50mR, Leakage Current=170uA, Manufacturer="Kyocera AVX", Manufacturer Part Number=TCJE686M025R0050, Max Operating Temperature=105°C, Min Operating Temperature=-55°C, Package Quantity=400, Supplier Part Number 1=478-9471-6-ND, Tolerance=20%, Voltage Rating=25V, Capacitance=68uF, Case Code (Imperial)=2917, ComponentLink1Description="Manufacturer URL", ComponentLink1URL=http://www.avx.com/, ComponentLink2Description=Datasheet, ComponentLink2URL=http://www.avx.com/docs/Catalogs/taj.pdf, ComponentLink3Description=http://www.avx.com/docs/catalogs/tcj.pdf?src-supplier=Avnet, ComponentLink3URL=http://www.avx.com/docs/catalogs/tcj.pdf?src-supplier=Avnet, Depth=4.3mm, Dissipation Factor=6%, Features="General Purpose", Height=4.3mm, Height - Seated (Max)=0.169inch, Length=7.3mm, Life (Hours)=2000Hour, Mount="Surface Mount", Packaging="Tape and Reel", Pricing 1="1=3.92, 10=3.163, 100=2.4672 (USD)", Radiation Hardening=No, Stock 1=439, Supplier 1=Digi-Key, Termination=SMD/SMT, Voltage Rating (DC)=25V, Width=0.169inch
C17: library part CMP-1037-04913-1, Capacitance=22pF, Manufacturer="Taiyo Yuden", Manufacturer Part Number=JMK316BJ106ML-T, Operating Temperature="-55°C ~ 85°C", Package / Case="1206 (3216 Metric)", Ratings=-, Supplier Part Number 1=587-5447-1-ND, Temperature Coefficient=X5R, Tolerance=±20%, Voltage - Rated=6.3V, Applications="SMPS Filtering", Category=Capacitors, ComponentLink1Description=http://ds.yuden.co.jp/TYCOMPAS/ut/detail.do?productNo=JMK316BJ106ML-T&fileName=JMK316BJ106ML-T_SS&mode=specSheetDownload, ComponentLink1URL=http://ds.yuden.co.jp/TYCOMPAS/ut/detail.do?productNo=JMK316BJ106ML-T&fileName=JMK316BJ106ML-T_SS&mode=specSheetDownload, Failure Rate=-, Features=-, Height - Seated (Max)=-, Lead Spacing=-, Lead Style=-, Mounting Type="Surface Mount, MLCC", Notification="Current market demand for these product types have resulted in fluctuating and extending lead times. Lead times may differ.", Packaging="Cut Tape (CT)", Part Status=Active, Pricing 1="1=0.24, 10=0.161, 100=0.0817, 500=0.05592, 1000=0.04946 (USD)", RoHS="RoHS Compliant", Size / Dimension="0.126\" L x 0.063\" W (3.20mm x 1.60mm)", Stock 1=5600, Supplier 1=Digi-Key, Thickness (Max)="0.071\" (1.80mm)"
C18 C19: library part CMP-1037-04913-1, Capacitance=.1uF, Manufacturer="Taiyo Yuden", Manufacturer Part Number=JMK316BJ106ML-T, Operating Temperature="-55°C ~ 85°C", Package / Case="1206 (3216 Metric)", Ratings=-, Supplier Part Number 1=587-5447-1-ND, Temperature Coefficient=X5R, Tolerance=±20%, Voltage - Rated=6.3V, Applications="SMPS Filtering", Category=Capacitors, ComponentLink1Description=http://ds.yuden.co.jp/TYCOMPAS/ut/detail.do?productNo=JMK316BJ106ML-T&fileName=JMK316BJ106ML-T_SS&mode=specSheetDownload, ComponentLink1URL=http://ds.yuden.co.jp/TYCOMPAS/ut/detail.do?productNo=JMK316BJ106ML-T&fileName=JMK316BJ106ML-T_SS&mode=specSheetDownload, Failure Rate=-, Features=-, Height - Seated (Max)=-, Lead Spacing=-, Lead Style=-, Mounting Type="Surface Mount, MLCC", Notification="Current market demand for these product types have resulted in fluctuating and extending lead times. Lead times may differ.", Packaging="Cut Tape (CT)", Part Status=Active, Pricing 1="1=0.24, 10=0.161, 100=0.0817, 500=0.05592, 1000=0.04946 (USD)", RoHS="RoHS Compliant", Size / Dimension="0.126\" L x 0.063\" W (3.20mm x 1.60mm)", Stock 1=5600, Supplier 1=Digi-Key, Thickness (Max)="0.071\" (1.80mm)"
C21: library part CMP-1038-00619-1, "CAP CER 4.7UF 50V X7R 1210", Case/Package=1210, Case Code (Metric)=3225, Dielectric=X7R, Manufacturer=Murata, Manufacturer Part Number=GCM32ER71H475KA55K, Max Operating Temperature=125°C, Min Operating Temperature=-55°C, Package Quantity=1, Ratings=AEC-Q200, Supplier Part Number 1=490-8066-6-ND, Tolerance=10%, Voltage Rating=50V, Capacitance=4.7uF, Case Code (Imperial)=1210, ComponentLink1Description=http://search.murata.co.jp/Ceramy/image/img/A01X/partnumbering_e_02.pdf?src-supplier=Digi-Key, ComponentLink1URL=http://search.murata.co.jp/Ceramy/image/img/A01X/partnumbering_e_02.pdf?src-supplier=Digi-Key, ComponentLink2Description=http://psearch.en.murata.com/capacitor/product/GCM32ER71H475KA55%23.pdf?src-supplier=Digi-Key, ComponentLink2URL=http://psearch.en.murata.com/capacitor/product/GCM32ER71H475KA55%23.pdf?src-supplier=Digi-Key, ComponentLink3Description=http://psearch.murata.com/capacitor/product/GCM32ER71H475KA55%23.pdf?src-supplier=Avnet, ComponentLink3URL=http://psearch.murata.com/capacitor/product/GCM32ER71H475KA55%23.pdf?src-supplier=Avnet, Depth=2.5mm, Height=2.5mm, Length=3.2mm, Mount="Surface Mount", Packaging="Tape and Reel", Pricing 1="1=1.8, 10=1.424, 100=1.0676, 500=0.80666, 1000=0.71177 (USD)", Radiation Hardening=No, Stock 1=63504, Supplier 1=Digi-Key, Termination=SMD/SMT, Thickness=0.106inch, Voltage Rating (DC)=50V, Width=0.098inch
C22: library part "Cap Pol3", "Polarized Capacitor (Surface Mount)"
D1: library part "D Schottky", "DIODE SCHOTTKY 40V 5A DO214AB", Capacitance @ Vr, F="380pF @ 4V, 1MHz", Current - Average Rectified (Io)=5A, Manufacturer="Comchip Technology", Operating Temperature - Junction="-50°C ~ 150°C", Package / Case="DO-214AC, SMA", Supplier Device Package="DO-214AC (SMA)", Supplier Part Number 1=641-1707-6-ND, Category="Discrete Semiconductor Products", ComponentLink1Description=http://www.comchiptech.com/cms/UserFiles/CDBA540-HF%20Thru505315.%20CDBA5200-HF%20RevC.pdf, ComponentLink1URL=http://www.comchiptech.com/cms/UserFiles/CDBA540-HF%20Thru505315.%20CDBA5200-HF%20RevC.pdf, Diode Type=Schottky, Manufacturer Part Number=CDBA540-HF, Mounting Type="Surface Mount", Packaging=Digi-Reel®, Part Status=Active, Pricing 1="1=0.49, 10=0.381, 25=0.3208, 100=0.2612, 250=0.2164, 500=0.1791, 1000=0.13432, 2500=0.12313 (USD)", RoHS="RoHS Compliant", Speed="Fast Recovery =< 500ns, > 200mA (Io)", Stock 1=7367, Supplier 1=Digi-Key
D2: library part CMP-0303-00003-1, "1.0 A Surface Mount Schottky Barrier Rectifier, 40 V, -65 to 125 degC, 2-Pin SOD-123 Package, RoHS, Tape and Reel", @ Terminal Temperature TT (degC)=90, Forward Voltage Drop VF (V)=0.45, Manufacturer="Diodes Inc", Maximum Average Rectified Current IO (A)=1, Maximum Reverse Current IR (uA)=50, Operating and Storage Temperature Range="-65 to 125 degC", Peak Forward Surge Current IFSM (A)=25, Peak Repetitive Reverse Voltage VRRM (V)=40, @ IF (A)=1, @ VR (V)=40, ComponentLink1Description="Manufacturer URL", ComponentLink1URL=http://www.diodes.com/, ComponentLink2Description=Datasheet, ComponentLink2URL=http://www.diodes.com/datasheets/ds30217.pdf, DatasheetVersion="Rev. 15-2", Mounting Technology="Surface Mount", PackageDescription="2-Pin SOD-123, Body 2.7 x 1.55 mm, Pitch 3.7 mm", PackageReference=SOD-123-2, Packing="Tape and Reel", PartNumber=1N5819HW-7-F, RoHS=TRUE, Total Capacitance CT (pF)=50, VR (RMS) (V)=28
L1: library part CMP-1354-00041-1, "WE-LQS SMD Power Inductor, L=33.0 µH", Inductance="33.0 µH", Manufacturer="Wuerth Elektronik", ComponentLink1Description="Manufacturer URL", ComponentLink1URL=http://www.we-online.com, ComponentLink2Description=Datasheet, ComponentLink2URL=http://katalog.we-online.de/pbs/datasheet/74404054330.pdf, PackageReference="WE-LQS 5040", PartNumber=74404054330
P1: library part "Header 15X2", "Header, 15-Pin, Dual row", Current Rating="5.7A per Contact", Insulation Color=Black, Manufacturer="Samtec Inc.", Material Flammability Rating="UL94 V-0", Operating Temperature="-55°C ~ 125°C", Supplier Part Number 1=SSW-115-21-G-D-ND, Voltage Rating=-, Applications=-, Category="Connectors, Interconnects", Connector Type=Receptacle, Contact Finish - Mating=Gold, Contact Finish - Post=Gold, Contact Finish Thickness - Mating="20.0µin (0.51µm)", Contact Finish Thickness - Post="3.00µin (0.076µm)", Contact Length - Post="0.104\" (2.64mm)", Contact Material="Phosphor Bronze", Contact Shape=Square, Contact Type=Forked, Fastening Type=Push-Pull, Features=-, Ingress Protection=-, Insulation Height="0.335\" (8.51mm)", Insulation Material="Liquid Crystal Polymer (LCP)", Manufacturer Part Number=SSW-115-21-G-D, Mated Stacking Heights=-, Mounting Type="Through Hole", Number of Positions=30, Number of Positions Loaded=All, Packaging=Bulk, Part Status=Active, Pitch - Mating="0.100\" (2.54mm)", Pricing 1="1=4.78 (USD)", RoHS="RoHS Compliant", Row Spacing - Mating="0.100\" (2.54mm)", Stock 1=0, Style="Board to Board or Cable", Supplier 1=Digi-Key, Termination=Solder
P2: "Header, 15-Pin, Dual row", LatestRevisionDate=17-Jul-2002, LatestRevisionNote="Re-released for DXP Platform.", Publisher="Altium Limited"
P3: Current Rating=-, Insulation Color=Natural, Manufacturer="Samtec Inc.", Material Flammability Rating="UL94 V-0", Operating Temperature="-55°C ~ 125°C", Supplier Part Number 1=SAM9597-ND, Voltage Rating="675VAC, 954VDC", Applications=-, Category="Connectors, Interconnects", ComponentLink1Description=http://suddendocs.samtec.com/prints/ipl1-1xx-xx-xxx-s-xx-x-xx-mkt.pdf, ComponentLink1URL=http://suddendocs.samtec.com/prints/ipl1-1xx-xx-xxx-s-xx-x-xx-mkt.pdf, Connector Type=Header, Contact Finish - Mating=Gold, Contact Finish - Post=Tin, Contact Finish Thickness - Mating="10µin (0.25µm)", Contact Finish Thickness - Post=-, Contact Length - Mating="0.215\" (5.46mm)", Contact Length - Post="0.085\" (2.16mm)", Contact Material="Phosphor Bronze", Contact Shape=Square, Contact Type="Male Pin", Fastening Type="Locking Ramp", Features=-, Ingress Protection=-, Insulation Height="0.240\" (6.10mm)", Insulation Material="Liquid Crystal Polymer (LCP)", Manufacturer Part Number=IPL1-104-01-L-S-RA-K, Mated Stacking Heights=-, Mounting Type="Through Hole, Right Angle", Number of Positions=4, Number of Positions Loaded=All, Number of Rows=1, Overall Contact Length=-, Packaging=Tube, Part Status=Active, Pitch - Mating="0.100\" (2.54mm)", Pricing 1="1=2.53, 10=2.424, 100=2.02, 500=1.717, 1000=1.4645, 5000=1.313 (USD)", RoHS="RoHS Compliant", Row Spacing - Mating=-, Shrouding="Shrouded - 4 Wall", Stock 1=265, Style="Board to Cable/Wire", Supplier 1=Digi-Key, Termination=Solder
Q1 Q2: library part CMP-1058-00598-1, "P-Channel Power MOSFET, -12 V, -5 A, 43 mOhm, Single, 6-Pin MCPH, Pb-Free, Tape and Reel", Manufacturer="On Semiconductor", Package Type="SC-88FL / MCPH-6", Channel Polarity="P Channel", Ciss Typ (pF)=660, ComponentLink1Description="Manufacturer URL", ComponentLink1URL=http://www.onsemi.com/, ComponentLink2Description=Datasheet, ComponentLink2URL=http://www.onsemi.cn/pub_link/Collateral/MCH6336-D.PDF, ComponentLink3Description="Package Specification", ComponentLink3URL=http://www.onsemi.com/pub_link/Collateral/ENA1601-D.PDF, Configuration=Single, Coss Typ (pF)=210, Crss Typ (pF)=155, ID Max (A)=5, Mounting Technology="Surface Mount", PackageDescription="6-Pin Small Outline Transistor, Body 2 x 1.6 mm, Pitch 0.65 mm", PackageReference=MCPH-6, Packing="Tape and Reel", PartNumber=MCH6336-TL-E, PD Max (W)=1.5, RoHS=Pb-Free, V(BR)DSS Min (V)=12, VGS(th) Max (V)=1.4, VGS Max (V)=10
R1 R2 R11 R14: library part CMP-1011-00463-1
R3 R5 R12 R13: library part CMP-1013-00017-1, "RES SMD 0.8 OHM 1% 1/8W 0805", ComponentLink1Description=https://www.mouser.com/datasheet/2/219/TLRH-2321.pdf, ComponentLink1URL=https://www.mouser.com/datasheet/2/219/TLRH-2321.pdf
R4 R6: library part CMP-1013-00017-1, Case/Package=0805, Case Code (Metric)=2012, Manufacturer=Vishay, Manufacturer Part Number=CRCW0805100KFKEA, Max Operating Temperature=155°C, Min Operating Temperature=-55°C, Package Quantity=5000, Power Rating=125mW, Resistance=100K, Supplier Part Number 1=CRCW0805100KFKEA/BKN, Temperature Coefficient=100ppm/°C, Tolerance=1%, Voltage Rating=150V, Case Code (Imperial)=0805, ComponentLink1Description=https://datasheet.ciiva.com/11809/0900766b80d98b26-11809057.pdf, ComponentLink1URL=https://datasheet.ciiva.com/11809/0900766b80d98b26-11809057.pdf, ComponentLink2Description=https://datasheet.ciiva.com/7777/1697337-7777349.pdf, ComponentLink2URL=https://datasheet.ciiva.com/7777/1697337-7777349.pdf, ComponentLink3Description=https://datasheet.ciiva.com/3258/dcrcwe3-3258006.pdf, ComponentLink3URL=https://datasheet.ciiva.com/3258/dcrcwe3-3258006.pdf, ComponentLink4Description=https://datasheet.ciiva.com/16754/70201119-16754822.pdf, ComponentLink4URL=https://datasheet.ciiva.com/16754/70201119-16754822.pdf, ComponentLink5Description=https://datasheet.ciiva.com/8337/dcrcwe3-8337738.pdf, ComponentLink5URL=https://datasheet.ciiva.com/8337/dcrcwe3-8337738.pdf, ComponentLink6Description=https://datasheet.ciiva.com/16341/dcrcwe3-16341530.pdf, ComponentLink6URL=https://datasheet.ciiva.com/16341/dcrcwe3-16341530.pdf, ComponentLink7Description=https://datasheet.ciiva.com/16852/dcrcwe3-16852810.pdf, ComponentLink7URL=https://datasheet.ciiva.com/16852/dcrcwe3-16852810.pdf, ComponentLink8Description=https://datasheet.ciiva.com/16720/70201119-16720891.pdf, ComponentLink8URL=https://datasheet.ciiva.com/16720/70201119-16720891.pdf, ComponentLink9Description=https://datasheet.ciiva.com/7777/1720486-7777565.pdf, ComponentLink9URL=https://datasheet.ciiva.com/7777/1720486-7777565.pdf, Composition="Thick Film", Contact Plating=Tin, Depth=1.25mm, Height=0.45mm, Lead Free="Lead Free", Length=2mm, Military Standard=Not, Mount="Surface Mount", Number of Pins=2, Packaging="Tape and Reel", Pricing 1="1=0.1, 10=0.049, 25=0.042, 50=0.035, 100=0.028 (USD)", Radiation Hardening=No, REACH SVHC=Unknown, Stock 1=1317, Supplier 1=Avnet, Termination=SMD/SMT, Voltage Rating (DC)=150V, Weight=0.000194oz, Width=1.25mm
R7 R8: library part CMP-1011-00927-1, Supplier Device Package=0402, Supplier Part Number 1=YAG3220CT-ND, Temperature Coefficient=±100ppm/°C, Tolerance=±1%
R9: library part CMP-1013-00017-1, Case/Package=0805, Case Code (Metric)=2012, Manufacturer="TE Connectivity Holsworthy", Manufacturer Part Number=CRG0805F11K, Max Operating Temperature=125°C, Min Operating Temperature=-55°C, Number of Resistors=1, Package Quantity=5000, Power Rating=125mW, Resistance=11kR, Supplier Part Number 1=A126334DKR-ND, Temperature Coefficient=100ppm/°C, Tolerance=1%, Voltage Rating=150V, Case Code (Imperial)=0805, ComponentLink1Description=https://datasheet.ciiva.com/11809/0900766b80d98b26-11809057.pdf, ComponentLink1URL=https://datasheet.ciiva.com/11809/0900766b80d98b26-11809057.pdf, ComponentLink2Description=https://datasheet.ciiva.com/7777/1697337-7777349.pdf, ComponentLink2URL=https://datasheet.ciiva.com/7777/1697337-7777349.pdf, ComponentLink3Description=https://datasheet.ciiva.com/3258/dcrcwe3-3258006.pdf, ComponentLink3URL=https://datasheet.ciiva.com/3258/dcrcwe3-3258006.pdf, ComponentLink4Description=https://datasheet.ciiva.com/16754/70201119-16754822.pdf, ComponentLink4URL=https://datasheet.ciiva.com/16754/70201119-16754822.pdf, ComponentLink5Description=https://datasheet.ciiva.com/8337/dcrcwe3-8337738.pdf, ComponentLink5URL=https://datasheet.ciiva.com/8337/dcrcwe3-8337738.pdf, ComponentLink6Description=https://datasheet.ciiva.com/16341/dcrcwe3-16341530.pdf, ComponentLink6URL=https://datasheet.ciiva.com/16341/dcrcwe3-16341530.pdf, ComponentLink7Description=https://datasheet.ciiva.com/16852/dcrcwe3-16852810.pdf, ComponentLink7URL=https://datasheet.ciiva.com/16852/dcrcwe3-16852810.pdf, ComponentLink8Description=https://datasheet.ciiva.com/16720/70201119-16720891.pdf, ComponentLink8URL=https://datasheet.ciiva.com/16720/70201119-16720891.pdf, ComponentLink9Description=https://datasheet.ciiva.com/7777/1720486-7777565.pdf, ComponentLink9URL=https://datasheet.ciiva.com/7777/1720486-7777565.pdf, ComponentLink10Description=http://www.mouser.com/ds/2/418/NG_CD_1623104_BA-655654.pdf?src-supplier=Mouser, ComponentLink10URL=http://www.mouser.com/ds/2/418/NG_CD_1623104_BA-655654.pdf?src-supplier=Mouser, Composition="Thick Film", ELV=Compliant, Height=0.55mm, Length=2mm, Mount="Surface Mount", Number of Terminations=2, Packaging="Tape and Reel", Pricing 1="1=0.1, 10=0.052, 100=0.021, 1000=0.00943, 2500=0.00819 (USD)", Stock 1=142510, Supplier 1=Digikey, Termination=Solder, Weight=0.000194oz, Width=1.25mm
R10: library part CMP-1013-00017-1, Case/Package=0805, Case Code (Metric)=2012, Manufacturer=Vishay, Manufacturer Part Number=CRCW080536K5FKEA, Max Operating Temperature=155°C, Max Power Dissipation=125mW, Min Operating Temperature=-55°C, Package Quantity=10, Resistance=36.5k, Supplier Part Number 1=541-36.5KCDKR-ND, Temperature Coefficient=100ppm/°C, Tolerance=1%, Voltage Rating=150V, Case Code (Imperial)=0805, ComponentLink1Description=https://datasheet.ciiva.com/11809/0900766b80d98b26-11809057.pdf, ComponentLink1URL=https://datasheet.ciiva.com/11809/0900766b80d98b26-11809057.pdf, ComponentLink2Description=https://datasheet.ciiva.com/7777/1697337-7777349.pdf, ComponentLink2URL=https://datasheet.ciiva.com/7777/1697337-7777349.pdf, ComponentLink3Description=https://datasheet.ciiva.com/3258/dcrcwe3-3258006.pdf, ComponentLink3URL=https://datasheet.ciiva.com/3258/dcrcwe3-3258006.pdf, ComponentLink4Description=https://datasheet.ciiva.com/16754/70201119-16754822.pdf, ComponentLink4URL=https://datasheet.ciiva.com/16754/70201119-16754822.pdf, ComponentLink5Description=https://datasheet.ciiva.com/8337/dcrcwe3-8337738.pdf, ComponentLink5URL=https://datasheet.ciiva.com/8337/dcrcwe3-8337738.pdf, ComponentLink6Description=https://datasheet.ciiva.com/16341/dcrcwe3-16341530.pdf, ComponentLink6URL=https://datasheet.ciiva.com/16341/dcrcwe3-16341530.pdf, ComponentLink7Description=https://datasheet.ciiva.com/16852/dcrcwe3-16852810.pdf, ComponentLink7URL=https://datasheet.ciiva.com/16852/dcrcwe3-16852810.pdf, ComponentLink8Description=https://datasheet.ciiva.com/16720/70201119-16720891.pdf, ComponentLink8URL=https://datasheet.ciiva.com/16720/70201119-16720891.pdf, ComponentLink9Description=https://datasheet.ciiva.com/7777/1720486-7777565.pdf, ComponentLink9URL=https://datasheet.ciiva.com/7777/1720486-7777565.pdf, ComponentLink10Description=http://www.mouser.com/ds/2/418/NG_CD_1623104_BA-655654.pdf?src-supplier=Mouser, ComponentLink10URL=http://www.mouser.com/ds/2/418/NG_CD_1623104_BA-655654.pdf?src-supplier=Mouser, ComponentLink11Description=http://uk.rs-online.com/webdocs/0d98/0900766b80d98b26.pdf?src-supplier=RSComponents, ComponentLink11URL=http://uk.rs-online.com/webdocs/0d98/0900766b80d98b26.pdf?src-supplier=RSComponents, ComponentLink12Description=https://www.verical.com/server-webapp/html/getDatasheet?partID=32738&src-supplier=Verical, ComponentLink12URL=https://www.verical.com/server-webapp/html/getDatasheet?partID=32738&src-supplier=Verical, ComponentLink13Description=http://www.farnell.com/datasheets/1697337.pdf?src-supplier=Farnell, ComponentLink13URL=http://www.farnell.com/datasheets/1697337.pdf?src-supplier=Farnell, ComponentLink14Description=http://www.vishay.com/docs/20035/dcrcwe3.pdf?src-supplier=Avnet, ComponentLink14URL=http://www.vishay.com/docs/20035/dcrcwe3.pdf?src-supplier=Avnet, ComponentLink15Description=http://www.farnell.com/datasheets/2111203.pdf?src-supplier=Element14, ComponentLink15URL=http://www.farnell.com/datasheets/2111203.pdf?src-supplier=Element14, ComponentLink16Description=https://www.alliedelec.com/m/d/0c934d6939ccefa68dbe0b96d821c8cf.pdf?src-supplier=Allied+Electronics, ComponentLink16URL=https://www.alliedelec.com/m/d/0c934d6939ccefa68dbe0b96d821c8cf.pdf?src-supplier=Allied+Electronics, ComponentLink17Description=http://www.vishay.com/docs/20035/dcrcwe3.pdf?src-supplier=Digi-Key, ComponentLink17URL=http://www.vishay.com/docs/20035/dcrcwe3.pdf?src-supplier=Digi-Key, ComponentLink18Description=http://www.farnell.com/datasheets/2049244.pdf?src-supplier=Element14, ComponentLink18URL=http://www.farnell.com/datasheets/2049244.pdf?src-supplier=Element14, ComponentLink19Description=http://www.vishay.com/docs/20035/dcrcwe3.pdf?src-supplier=Avnet+Europe, ComponentLink19URL=http://www.vishay.com/docs/20035/dcrcwe3.pdf?src-supplier=Avnet+Europe, Composition="Thick Film", Contact Plating=Tin, Depth=1.25mm, Features="Automotive AEC-Q200", Height=0.45mm, Length=2mm, Military Standard=Not, Number of Pins=2, Number of Terminations=2, Packaging="Tape and Reel", Power Rating=125mW, Pricing 1="1=0.1, 10=0.069, 100=0.028, 1000=0.01256, 2500=0.0109 (USD)", Radiation Hardening=No, REACH SVHC=Unknown, Stock 1=56622, Supplier 1=Digi-Key, Termination=SMD/SMT, Weight=0.000194oz, Width=1.25mm
U1: library part CMP-0394-00528-2, "Single Output LDO, 300 mA, Fixed 3.3 V Output, 2 to 5.5 V Input, with Low IQ, 5-pin SOT-23 (DBV), -40 to 125 degC, Green (RoHS & no Sb/Br)", Manufacturer="Texas Instruments", Accuracy(%)=2, Code_JEDEC=MO-178, ComponentLink1Description="Manufacturer URL", ComponentLink1URL=http://www.ti.com/, ComponentLink2Description=Datasheet, ComponentLink2URL=http://www.ti.com/general/docs/lit/getliterature.tsp?genericPartNumber=TLV70233&fileType=pdf, ComponentLink3Description="Package Specification", ComponentLink3URL=http://www.ti.com/litv/pdf/mpds018i, DatasheetVersion=SLVSAG6B, Eco-Plan="Green (RoHS & no Sb/Br)", Fixed Output Options(V)=3.3, Iout(Max)(A)=0.3, Iq(Typ)(mA)=0.03, Mounting Technology="Surface Mount", PackageDescription="5-Pin Plastic Small Outline, Body 1.60 Ã— 2.90 mm, Pitch 0.95 mm", PackageReference=DBV0005A, PackageVersion=4073253-4/K, PartNumber=TLV70233DBVR, SubFamily="Single Channel LDO", Vdo(Typ)(mV)=220, Vin(Max)(V)=5.5, Vin(Min)(V)=2, Vout Adj(Max)(V)=3.3, Vout Adj(Min)(V)=3.3
U2: "IC REG MULT CONFIG INV ADJ 8MSOP", Supplier Part Number 1=584-LT8570EMS8ETRPBF, Supplier 1=Mouser
U3: "IC REG SWTCHD CAP INV 6SOT23", Current - Output=200mA, Frequency - Switching=2MHz, Manufacturer="Texas Instruments", Operating Temperature="-40°C ~ 85°C (TA)", Package / Case=SOT-23-6, Supplier Part Number 1=296-43957-6-ND, Voltage - Input (Max)=5.5V, Voltage - Input (Min)=2.7V, Voltage - Output (Max)=-, Voltage - Output (Min/Fixed)=-Vin, Category="Integrated Circuits (ICs)", ComponentLink1Description=http://www.ti.com/lit/ds/symlink/lm2776.pdf, ComponentLink1URL=http://www.ti.com/lit/ds/symlink/lm2776.pdf, Function=Ratiometric, Manufacturer Part Number=LM2776DBVR, Mounting Type="Surface Mount", Number of Outputs=1, Output Configuration=Negative, Output Type=Fixed, Packaging=Digi-Reel®, Part Status=Active, Pricing 1="1=1.05, 10=0.936, 100=0.7297, 500=0.60276, 1000=0.47586 (USD)", RoHS="RoHS Compliant", Stock 1=13045, Supplier 1=Digi-Key, Supplier Device Package=SOT-23-6, Synchronous Rectifier=No, Topology="Charge Pump"
U4: library part CMP-2000-06614-1, "Buck-Boost uModule Regulator, 8.5 A, 5 to 36 V, -40 to 125 degC, 121-Ball BGA, RoHS, Tray", Current - Output (Max)=8.5A, Manufacturer=LinearTechnology, Operating Temperature=-40°C~125°C, Package / Case=121-BGA, Package Description="121-Ball BGA, Body 15 x 15 mm, Pitch 1.27 mm", Package Reference=BGA-121, Package Version="Rev. A, 11/2012", Power (Watts) - Manufacture Series=-, Voltage - Input (Max)=36V, Voltage - Input (Min)=5V, Voltage - Output 1=1.2~36V, Applications=ITE(Commercial), Category=PowerSupplies-BoardMount, Datasheet URL=http://cds.linear.com/docs/en/datasheet/8055fa.pdf, Datasheet Version="Rev. A, 01/2016", Efficiency=97.5%, Family=DCDCConverters, Features=OTP, Manufacturer URL=http://www.linear.com/, Mounting Technology=SurfaceMount, Mounting Type=SurfaceMount, Number of Outputs=1, Package URL=http://www.linear.com/docs/41075, Packaging=Tray, PartId=1, Power (Watts) - Max=-, Series=µModule®, Type=Non-IsolatedPoLModule, Voltage - Isolation=-, Voltage - Output 2=-, Voltage - Output 3=-
U5: library part CMP-0809-00005-2, "Precision, Low Noise, Rail-to-Rail Output, Zero-Drift Operational Amplifier, 4 to 36 V, -40 to 125 degC, 5-pin SOT23 (DBV5), Green (RoHS & no Sb/Br)", Current - Supply=450µA, Manufacturer="Texas Instruments", Operating Temperature="-40°C ~ 125°C", Package / Case="SC-74A, SOT-753", Supplier Device Package=SOT-23-5, Supplier Part Number 1=296-40438-1-ND, Voltage - Supply, Single/Dual (±)="4 V ~ 36 V, ±2 V ~ 18 V", Amplifier Type=Zero-Drift, Category="Integrated Circuits (ICs)", ComponentLink1Description=http://www.ti.com/lit/ds/symlink/opa188.pdf, ComponentLink1URL=http://www.ti.com/lit/ds/symlink/opa188.pdf, Manufacturer Part Number=OPA188AIDBVR, Mounting Type="Surface Mount", Output Type=Rail-to-Rail, Packaging="Cut Tape (CT)", Part Status=Active, Pricing 1="1=2.46, 10=2.211, 100=1.7771, 500=1.46002, 1000=1.20974 (USD)", RoHS="RoHS Compliant", Slew Rate="0.8 V/µs", Stock 1=1779, Supplier 1=Digi-Key
U6 U7: library part CMP-0479-00214-1, "Low Loss PowerPath Controller for Large PFET, 3 to 36 V Vin, 8-pin SOP (MS8-8), -40 to 85 degC, Pb-Free, Tape and Reel", Manufacturer="Linear Technology", ComponentLink1Description="Manufacturer URL", ComponentLink1URL=http://www.linear.com/, ComponentLink2Description=Datasheet, ComponentLink2URL=http://cds.linear.com/docs/en/datasheet/4414fc.pdf, ComponentLink3Description="Package Specification", ComponentLink3URL=http://cds.linear.com/docs/en/packaging/05081660_G_MS8.pdf, DatasheetVersion="Rev. C", Ideal Diode="Single, External, P-Channel", Mounting Technology="Surface Mount", PackageDescription="8-Pin Plastic MSOP, Body 3 x 3 mm, Pitch 0.65 mm", PackageReference=MS8-8, PackageVersion="Rev. G, 03/2012", Packing="Tape and Reel", PartNumber=LTC4414EMS8#TRPBF, RoHS=TRUE
U9: library part CMP-0483-00080-1, "EN55022B Compliant 36 VIN, 15 VOUT, 5 A, DC/DC uModule Regulator, 133-pin LGA, -40 to 125 degC, Pb-Free, Tray", Extended Temp="E, I, MP", Frequency(kHz)=940, Frequency Sync Range="200kHz - 1.3MHz", Manufacturer="Linear Technology", Output Current(A)=5, Switch Current(A)=9, Code_JEDEC=MO-222, ComponentLink1Description="Manufacturer URL", ComponentLink1URL=http://www.linear.com/, ComponentLink2Description=Datasheet, ComponentLink2URL=http://cds.linear.com/docs/en/datasheet/4612fb.pdf, ComponentLink3Description="Package Specification", ComponentLink3URL=http://cds.linear.com/docs/en/packaging/05081766_A_lga133.pdf, DatasheetVersion="Rev. B", Ishutdown(uA)=50, Isupply(mA)=4.5, Mounting Technology="Surface Mount", Number of Outputs=1, PackageDescription="133-Pin LGA, Body 15 x 15 mm, Pitch 1.27 mm", PackageReference=LGA-133, PackageVersion="Rev. A, 02/2013", Packing=Tray, PartId=1, PartNumber=LTM4612EV#PBF, RoHS=TRUE, Synchronous=yes, Topology=Buck, Tracking=yes, Vin Max(V)=36, Vin Min(V)=5, Vout Max(V)=15, Vout Min(V)=3.3

## Free pads (board coordinates)
  round 196.85 hole 118.11: 3(4978.41,-4849.59) ""(157.98,149.55) ""(157.98,2511.75) ""(2244.59,149.55) ""(2244.59,2511.75)

## Via types
v1: diameter 50, hole 28, Top Layer to Bottom Layer, 21 vias
v2: diameter 13.78, hole 9.84, Top Layer to Bottom Layer, 13 vias
v3: diameter 19.68, hole 7.87, Top Layer to Bottom Layer, 4 vias

## Nets (pads, with @x,y where several pads share a name; then routed paths per layer and width w, separated by ;. In a path a pad name is that pad's centre, name@x,y a point inside that pad or via, vN(x,y) a via of type N, cw(c..) or ccw(c..) an arc to the next point about the centre after c; other vN are vias at no path point)
+3.3: C1.2 P1.26 P2.5 R7.2 R8.2 U1.5 | length 5996.5
  Top Layer w10: P2.5 293.06,1918.05 330,1955 R8.2 ; v1(805,1930) 805.45,1929.55 R7.2
  Signal Layer 1 w10: v1(225,270) 2055,270 2380,595 2380,940 2350,970 2240,970 2194.59,924.59 P1.26
  Signal Layer 2 w10: P2.5 154.92,1865 60,1865 35,1840 35,560 225,370 v1(225,270)
  Bottom Layer w10: P2.5 219.92,1930 v1(805,1930) ; v1(225,270) 454.4,270 507.9,216.5 U1.5
+5: C2.2 C9.1 C14.1 C27.1 P1.2 P1.21 P2.1 U1.1 U1.3 U3.3 U3.4 U5.5 U9.J1 U9.J2 U9.J3 U9.J4 U9.J5 U9.J6 U9.J7 U9.J8 U9.J9 U9.J10 U9.J11 U9.K1 U9.K2 U9.K3 U9.K4 U9.K5 U9.K6 U9.K7 U9.K8 U9.K9 U9.K10 U9.K11 U9.L1 U9.L2 U9.L3 U9.L4 U9.L5 U9.L6 U9.L7 U9.L8 U9.L9 U9.L10 U9.L11 U9.M1 U9.M2 U9.M3 U9.M4 U9.M5 U9.M6 U9.M7 U9.M8 U9.M9 U9.M10 U9.M11 | length 10615.6
  Top Layer w10: v1@1192.6,82.6 U5.5
  Signal Layer 2 w10: v1(1190,80) 2005,80 2095,170 2095,1040 2130,1075 2260,1075 2294.59,1109.59 P1.21
  Signal Layer 2 w19.68: 281.95,2118.05 330,2070 2146.54,2070 P1.2
  Signal Layer 2 w50: P2.1 281.95,2118.05